# EAGLE board tdlf_08_15_2021_server_top (EAGLE 9.6.2)
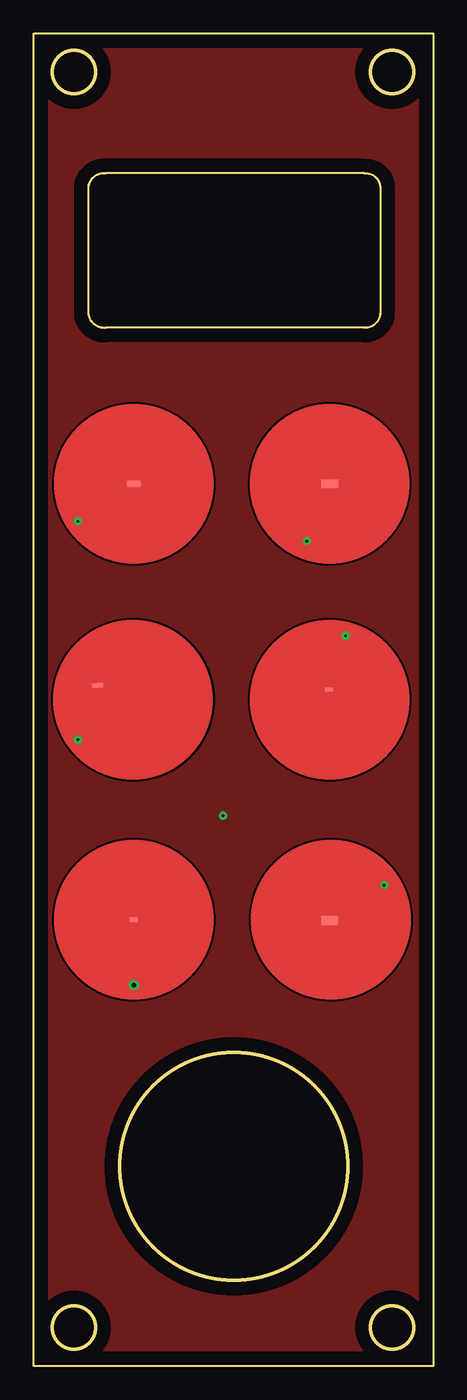
[diagram p0: board, top side]
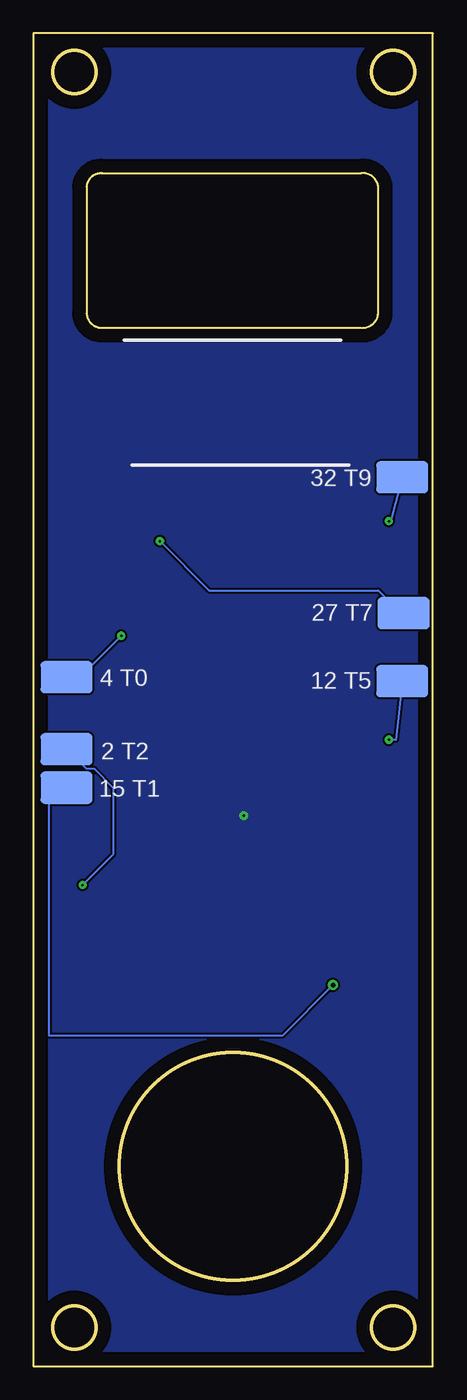
[diagram p1: board, bottom side, seen from below]

Size 30 x 100 mm. Coordinates in mm from the lower left corner, seen from the top.
Outline: 0,0 0,100 30,100 30,0 0,0
Outline: 24.8,89.5 5.4,89.5 arc90 4.1,88.5 4.1,79 arc90 5.4,77.9 24.8,77.9 arc90 26,79 26,88.5 arc90 24.8,89.5
Outline: circle at 26.9,97.1 radius 1.62
Outline: circle at 3,97.1 radius 1.62
Outline: circle at 3,2.9 radius 1.62
Outline: circle at 26.9,2.9 radius 1.62
Outline: circle at 15,15 radius 8.54
Copper layers (1*16): Top 0.035mm / dielectric 1.5mm / Bottom 0.035mm
Design rules "default": minimum track width 6mil, minimum drill 0.35mm, track to track 6mil, track to pad 6mil, pad to pad 6mil, via to via 6mil, smd to smd 6mil, copper to edge 40mil, drill to drill 6mil, minimum pad ring 10mil, minimum via ring 8mil, stop-mask expansion 4mil, vias tented up to drill 0mil, thermal gap 10mil

## Footprints (pad centres in the part's own frame; a part is rotated, then mirrored left to right if it is on the bottom)
TDLF_CAP_02 = smd 0.813 x 0.406: P$1 -2.55,2.1
TDLF_CAP_PLUS = smd 1.016 x 0.508: P$1 0,0
LUXEON-PAD = smd 3.9 x 2.4: P$1 0,0
TDLF_CAP_MOINS = smd 1.27 x 0.635: P$1 0.025,0
TDLF_CAP_SPIRAL = smd 0.61 x 0.305: P$1 -0.025,0
TDLF_CAP_KOPIMI = smd 0.61 x 0.305: P$1 -0.051,0.762
TDLF_CAP_ACHTUNG = smd 1.27 x 0.66: P$1 -0.102,-0.051

## Placement (x,y rotation side)
CAP_MUSH  MUSH  [TDLF_CAP_02]  7.5,49.2 5 top
CAP_PLUS  [TDLF_CAP_PLUS]  7.5,66.2 0 top
JP1  [LUXEON-PAD]  2.3,51.4 0 bottom
JP2  [LUXEON-PAD]  2.2,56.5 0 bottom
JP3  [LUXEON-PAD]  2.3,66.7 0 bottom
JP4  [LUXEON-PAD]  27.5,43.4 0 bottom
JP5  [LUXEON-PAD]  27.5,51.7 0 bottom
JP7  [LUXEON-PAD]  27.5,46.3 0 bottom
U$1  [TDLF_CAP_MOINS]  22.2,66.2 0 top
U$2  [TDLF_CAP_SPIRAL]  7.5,33.5 0 top
U$3  [TDLF_CAP_KOPIMI]  22.2,50 0 top
U$4  [TDLF_CAP_ACHTUNG]  22.3,33.5 0 top

## Library data of the parts
CAP_MUSH CAP_PLUS U$1-U$4 = alx_lib
JP1-JP5 JP7 = SparkFun-Connectors

## Nets
CHAMPI: CAP_MUSH.P$1 JP1.P$1
KOPIMI: JP5.P$1 U$3.P$1
MOINS: JP2.P$1 U$1.P$1
N$1: JP7.P$1 U$4.P$1
PLUS: CAP_PLUS.P$1 JP3.P$1
SPIRAL: JP4.P$1

## Tracks (layer width: path | path; a pad name or v marks a point on that pad's centre or on a via)
CHAMPI  (via drill 0.2)
  Top 0.152: CAP_MUSH.P$1 4.78,48.48 v3.3,47
  Bottom 0.152: JP1.P$1 2.77,47 v3.3,47
GND  (via drill 0.2)
  other vias: 14.2,41.3
  pour Bottom: 0,114.2 29.9,114.2 30,114.1 30,-13.9 29.8,-14.1 0,-14.1
  pour Top: 0.2,114.21 29.9,113.91 29.9,-14 0.2,-14
KOPIMI  (via drill 0.2)
  Top 0.152: v23.4,54.8 22.15,53.55 U$3.P$1
  Bottom 0.152: JP5.P$1 26.5,51.7 v23.4,54.8
MOINS  (via drill 0.2)
  Top 0.152: v20.5,61.9 20.5,63.42 21.67,65.64 U$1.P$1
  Bottom 0.152: JP2.P$1 2.3,56.4 | 2.3,56.4 2.55,56.15 | v20.5,61.9 16.8,58.2 4.1,58.2 2.3,56.4
N$1  (via drill 0.2)
  Top 0.152: v26.3,36.1 24.85,36.1 U$4.P$1
  Bottom 0.152: JP7.P$1 26.03,44.83 25.43,44.83 24,43.4 24,38.4 v26.3,36.1
PLUS  (via drill 0.2)
  Top 0.152: CAP_PLUS.P$1 6.1,66.2 v3.3,63.4
  Bottom 0.152: JP3.P$1 3.2,63.3 3.3,63.3 v3.3,63.4
SPIRAL  (via drill 0.35)
  Top 0.152: 7.47,28.62 v7.5,28.6 7.5,33.5
  Bottom 0.152: JP4.P$1 28.83,43.4 28.83,24.8 11.3,24.8 v7.5,28.6

## Text on the board
bNames: 32 T9 | 27 T7 | 12 T5 | 4 T0 | 2 T2 | 15 T1
tStop: Technologies / de la fête | v 0.3